# Altium PCB ECE453_Interface.PcbDoc
Units mil, origin at the board's own origin, x right, y up, seen from the top; angles counter-clockwise.
Board outline 3947.04 x 4820.02 mil, 2 copper layers (Top Layer, Bottom Layer); 72 components, 65 nets, 282 pads, 0 vias.
Unrouted connection lines stored in the file: 205.
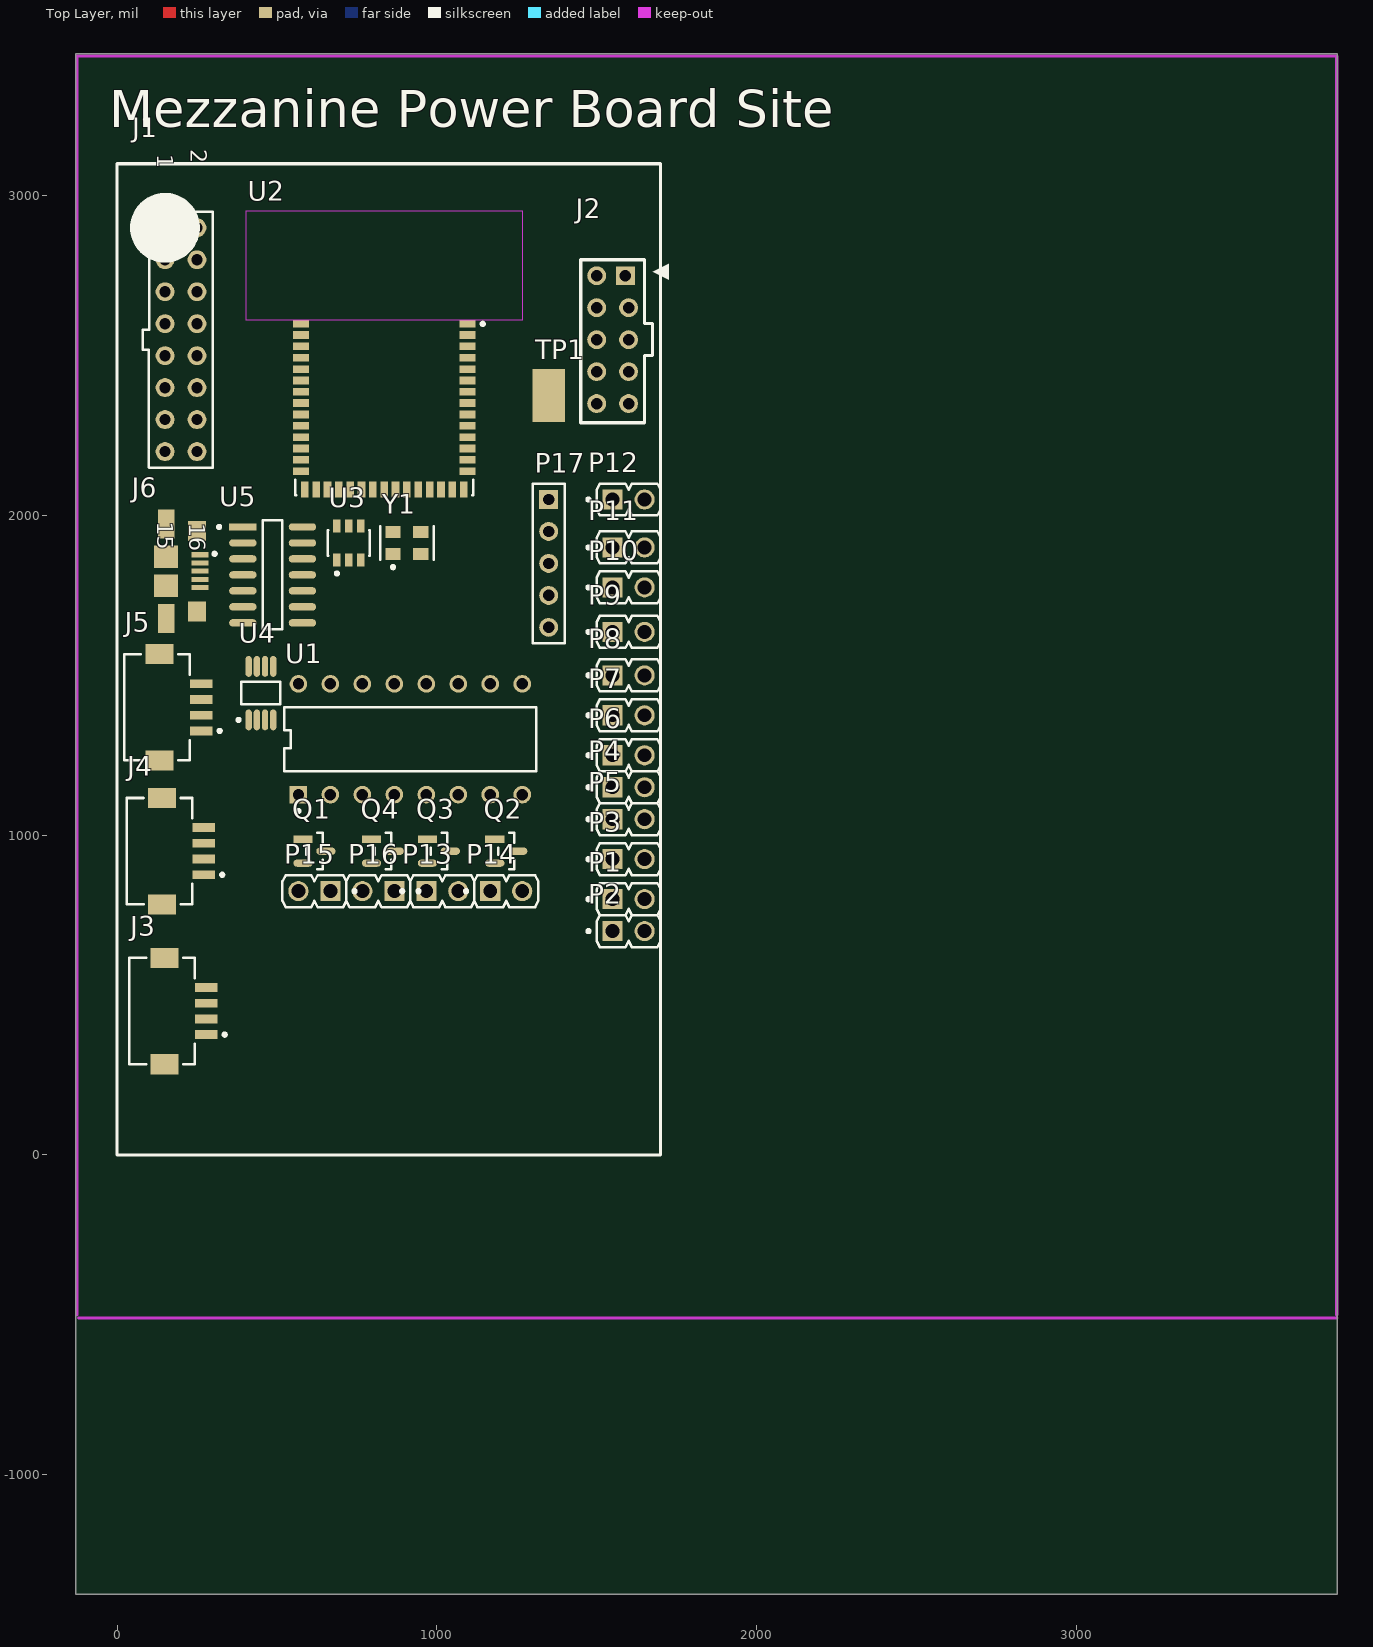
[diagram p0: Top Layer view]
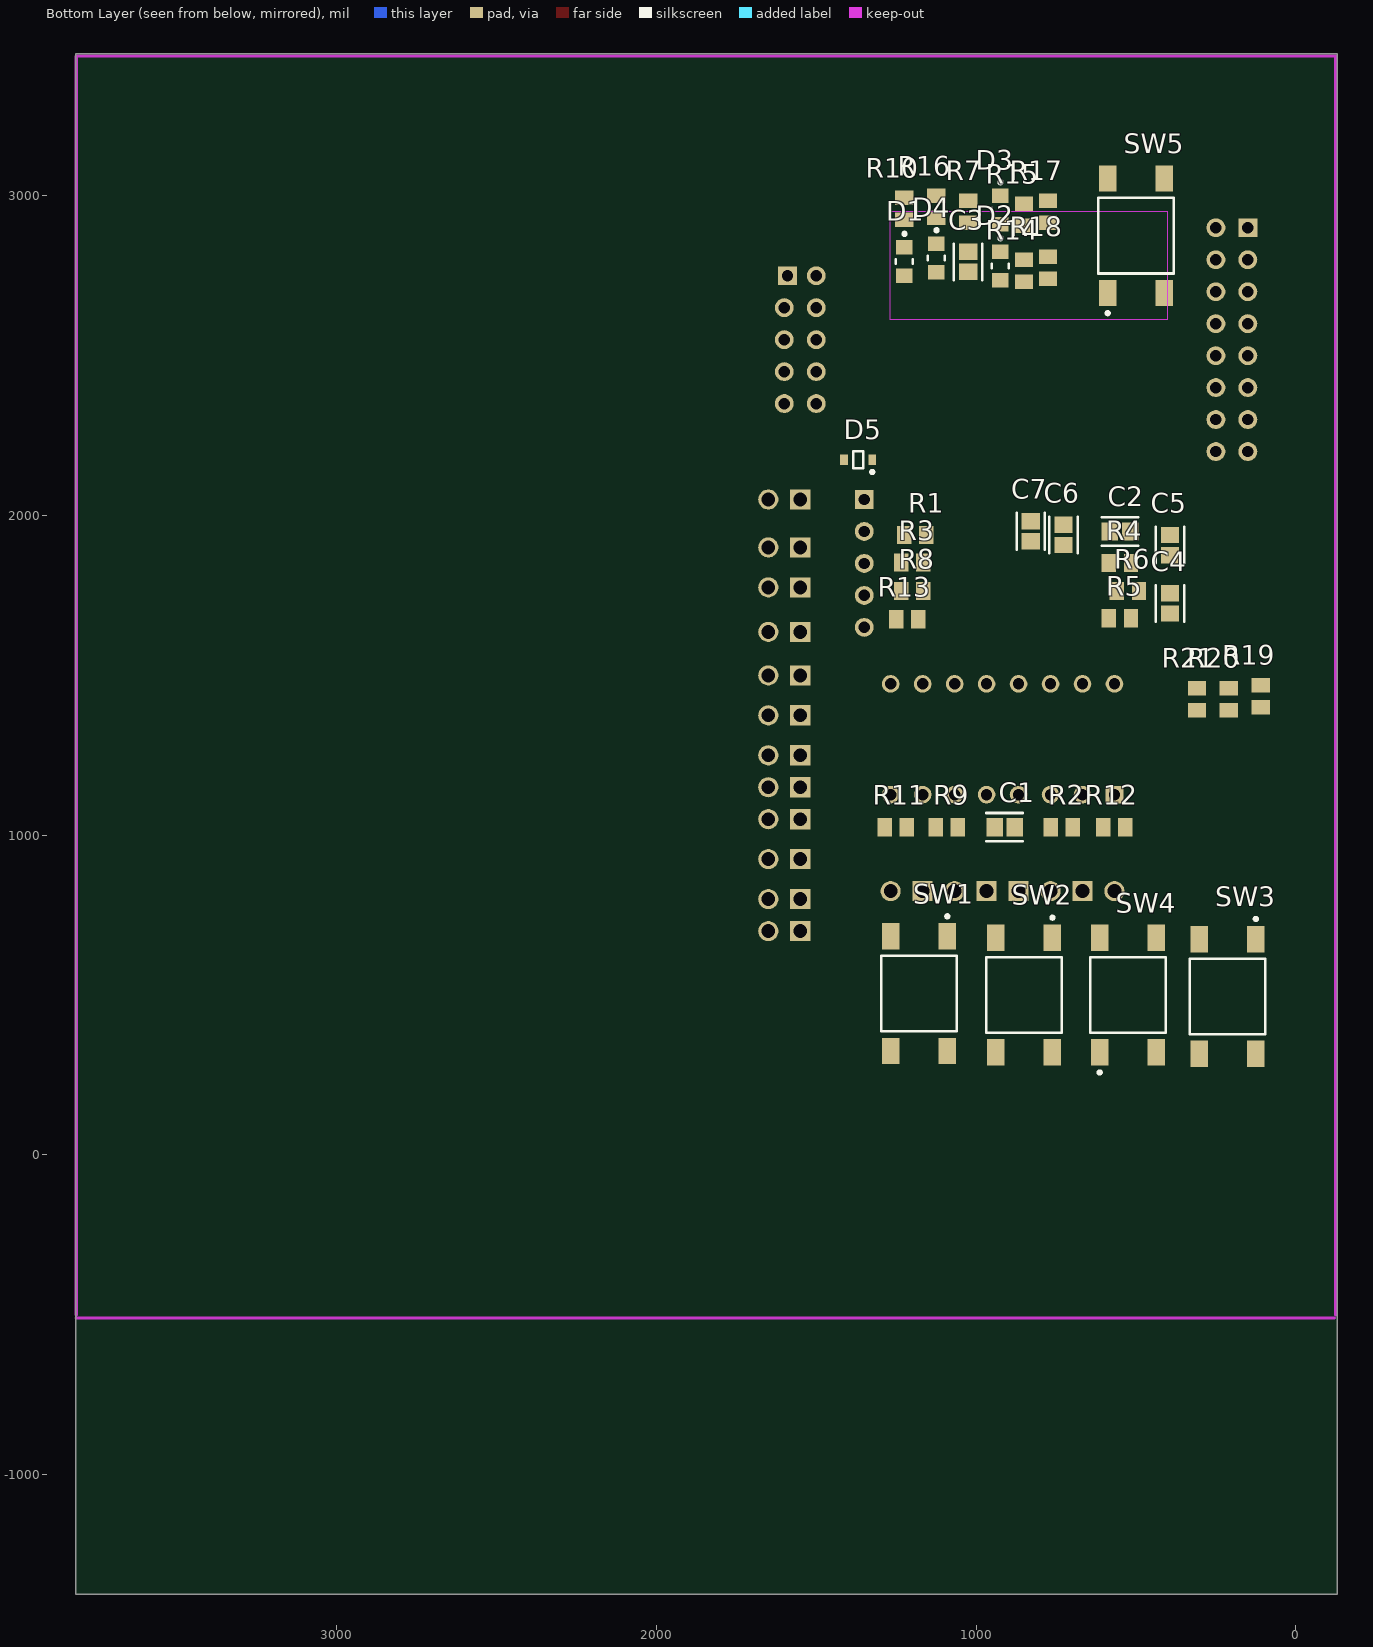
[diagram p1: Bottom Layer view, seen from below]

## Layer stack, top to bottom
Top Solder: solder mask 0.4, Solder Resist, Dk 3.5
Top Layer: signal copper 1.4
Dielectric1: dielectric 12.6, FR-4, Dk 4.8
Bottom Layer: signal copper 1.4
Bottom Solder: solder mask 0.4, Solder Resist, Dk 3.5

## Board outline
-130.02,-1375 3817.02,-1375 3817.02,3437.01 ccw(c3812.06,3437.02) 3816.79,3438.5 ccw(c3812.05,3439.99) 3817.02,3440 ccw(c3812.01,3440) 3812.01,3445.02 -125,3445.02 ccw(c-125,3440) -130.02,3440

## Design rules (kind name [scope] priority, off if disabled: settings)
Clearance Polygon_Clearance [All vs InPolygon] p1: gap=12 ignorepadtopadclearanceinfootprint=FALSE except(0: Arc-Hole Track-Hole SMDPad-Hole THPad-Hole Via-Hole Fill-Hole Poly-Hole Region-Hole Text-Hole)
Clearance [All] p2: gap=7.87 ignorepadtopadclearanceinfootprint=TRUE except(0: Arc-Hole Track-Hole SMDPad-Hole THPad-Hole Via-Hole Fill-Hole Poly-Hole Region-Hole Text-Hole)
ComponentClearance [InComponent('U3')] p1: gap=0 collisioncheckmode=3 verticalgap=10 showdistances=FALSE
Height [All] p1: minheight=0 maxheight=866.14 prefheight=500
HoleSize [All] p1: absolutevalues=TRUE maxlimit=250 minlimit=1.18 maxpercent=80.000 minpercent=20.000
MinimumSolderMaskSliver [All] p1: minsoldermaskwidth=7
NetAntennae NetAntennae_5.0V [InNet('5.0V')] p1: netantennaetolerance=0
NetAntennae NetAntennae_3.3V [InNet('3.3V')] p2: netantennaetolerance=0
PolygonConnect [IsNamedPolygon('5.0V_L01_P019') or IsNamedPolygon('3.3V_L01_P020') vs IsVia] p1: connectstyle=Relief reliefconductorwidth=10 reliefentries=4 polygonreliefangle="90 Angle" airgapwidth=10
PolygonConnect PolygonConnect_2 [All vs IsVia] p2: connectstyle=Relief reliefconductorwidth=15 reliefentries=4 polygonreliefangle="90 Angle" airgapwidth=10
PolygonConnect PolygonConnect_1 [All] p3: connectstyle=Relief reliefconductorwidth=10 reliefentries=4 polygonreliefangle="90 Angle" airgapwidth=10
RoutingVias [All] p1: holewidth=28 width=50 viastyle="Through Hole" minholewidth=15 minwidth=25 maxholewidth=28 maxwidth=50
SolderMaskExpansion [All] p1: expansion=4 istentingtop=FALSE
Width [All] p1: maxlimit=472.44 minlimit=3.94 preferedwidth=10 minimp=50.000000 maximp=50.000000 favimp=50.000000
25 further rules are at their usual default settings.

## Components (designator, comment, footprint, x,y, rotation, side; value= is the part's Value field where it differs from the comment)
C1 "Cap" Yageo_CC0805-0.85_IPC_B 910.76,1025 r180 bottom value=10nF
C2 "Cap" Yageo_CC0805-0.85_IPC_B 550,1950 r180 bottom value=10nF
C3 "Cap" Yageo_CC0805-0.85_IPC_B 1025,2793.47 r90 bottom value=10uF
C4 "Cap" Yageo_CC0805-0.85_IPC_B 393.38,1725 r90 bottom value=10uF
C5 "Cap" Yageo_CC0805-0.85_IPC_B 393.38,1907.45 r90 bottom value=10uF
C6 "Cap" Yageo_CC0805-0.85_IPC_B 726.57,1939.17 r90 bottom value=12pF
C7 "Cap" Yageo_CC0805-0.85_IPC_B 829.14,1950.71 r90 bottom value=12pF
D1 "LED1" Dialight_598_0 1225,2794.29 r270 bottom
D2 "LED1" Dialight_598_0 925,2780.71 r270 bottom
D3 "LED1" Dialight_598_0 925,2955.71 r270 bottom
D4 "LED1" Dialight_598_0 1125,2805.71 r270 bottom
D5 "" On_Semiconductor_BAT54HT1G_0 1368.9,2174.02 r0 bottom
J1 "SFH11-PBPC-D08-ST-BK" SFH11-PBPC-D08-ST-BK 200,2550 r270 top
J2 "SFH11-PBPC-D05-ST-BK" SFH11-PBPC-D05-ST-BK 1500,2550 r270 top
J3 "DF13A-4P-1_25H_51" Hirose_0_MFG 140.75,450 r90 top
J4 "DF13A-4P-1_25H_51" Hirose_0_MFG 132.87,950 r90 top
J5 "DF13A-4P-1_25H_51" Hirose_0_MFG 125,1400 r90 top
J6 "Conn_TE_CONNECTIVITY_-_AMP_CONNECTORS_1981584-1_eec" TE_CONNECTIVITY_-_AMP_CONNECTORS_1981584-1_0 153.54,1825.98 r270 top
P1 "613 002 111 21" WE-61300211121_V 1600,800 r0 top
P2 "613 002 111 21" WE-61300211121_V 1600,700 r0 top
P3 "613 002 111 21" WE-61300211121_V 1600,925 r0 top
P4 "613 002 111 21" WE-61300211121_V 1600,1150 r0 top
P5 "613 002 111 21" WE-61300211121_V 1600,1050 r0 top
P6 "613 002 111 21" WE-61300211121_V 1600,1250 r0 top
P7 "613 002 111 21" WE-61300211121_V 1600,1375 r0 top
P8 "613 002 111 21" WE-61300211121_V 1600,1500 r0 top
P9 "613 002 111 21" WE-61300211121_V 1600,1635.83 r0 top
P10 "613 002 111 21" WE-61300211121_V 1600,1775 r0 top
P11 "613 002 111 21" WE-61300211121_V 1600,1900 r0 top
P12 "613 002 111 21" WE-61300211121_V 1600,2050 r0 top
P13 "613 002 111 21" WE-61300211121_V 1017.28,825 r0 top
P14 "613 002 111 21" WE-61300211121_V 1217.28,825 r0 top
P15 "613 002 111 21" WE-61300211121_V 617.28,825 r180 top
P16 "613 002 111 21" WE-61300211121_V 817.28,825 r180 top
P17 "Header 5" HDR1X5 1350,2050 r270 top
Q1 "MOSFET-N" On_Semiconductor_318-08_IPC_B 617.28,950 r0 top
Q2 "MOSFET-N" On_Semiconductor_318-08_IPC_B 1217.28,950 r0 top
Q3 "MOSFET-N" On_Semiconductor_318-08_IPC_B 1006.45,950 r0 top
Q4 "MOSFET-N" On_Semiconductor_318-08_IPC_B 831.45,950 r0 top
R1 "Res1" RESC2013X70X40NL20T20 1190.55,1939.17 r0 bottom value=10K
R2 "Res1" RESC2013X70X40NL20T20 732.83,1025 r0 bottom value=10K
R3 "Res1" RESC2013X70X40NL20T20 1200,1852.76 r0 bottom value=10K
R4 "Res1" RESC2013X70X40NL20T20 550,1851.57 r180 bottom value=10K
R5 "Res1" RESC2013X70X40NL20T20 550,1678.35 r180 bottom value=10K
R6 "Res1" RESC2013X70X40NL20T20 525,1764.17 r180 bottom value=10K
R7 "0" RESC2013X70X40NL20T20 1025,2950 r90 bottom
R8 "Res1" RESC2013X70X40NL20T20 1200,1764.17 r0 bottom value=10K
R9 "Res1" RESC2013X70X40NL20T20 1092.28,1025 r180 bottom value=10K
R10 "Res1" RESC2013X70X40NL20T20 1225,2959.45 r90 bottom value=400
R11 "Res1" RESC2013X70X40NL20T20 1251.73,1025 r180 bottom value=10K
R12 "Res1" RESC2013X70X40NL20T20 567.28,1025 r180 bottom value=10K
R13 "Res1" RESC2013X70X40NL20T20 1215.55,1675.59 r0 bottom value=10K
R14 "Res1" RESC2013X70X40NL20T20 850,2765.55 r270 bottom value=400
R15 "Res1" RESC2013X70X40NL20T20 850,2940.55 r90 bottom value=400
R16 "Res1" RESC2013X70X40NL20T20 1125,2965.55 r90 bottom value=400
R17 "Res1" RESC2013X70X40NL20T20 775,2950 r90 bottom value=1.5K
R18 "Res1" RESC2013X70X40NL20T20 775,2775 r90 bottom value=1.5K
R19 "Res1" RESC2013X70X40NL20T20 109.45,1434.84 r90 bottom value=10K
R20 "Res1" RESC2013X70X40NL20T20 209.45,1425.39 r90 bottom value=10K
R21 "Res1" RESC2013X70X40NL20T20 309.45,1425.39 r90 bottom value=10K
SW1 "Switch_TE_FSM2JSMAATR_eec" TE_FSM2JSMAATR_0 1178.7,504.13 r270 bottom
SW2 "Switch_TE_FSM2JSMAATR_eec" TE_FSM2JSMAATR_0 850,500 r270 bottom
SW3 "Switch_TE_FSM2JSMAATR_eec" TE_FSM2JSMAATR_0 213.58,495.87 r270 bottom
SW4 "Switch_TE_FSM2JSMAATR_eec" TE_FSM2JSMAATR_0 525,500 r90 bottom
SW5 "Switch_TE_FSM2JSMAATR_eec" TE_FSM2JSMAATR_0 500,2875 r90 bottom
TP1 "TP_1206" TP-SMC-1206 1350,2375 r90 top
U1 "IC_STMicroelectronics_L293D_eec" STMicroelectronics_L293D_0 917.28,1300 r90 top
U2 "CYBLE-416045-02" Cypress_Semiconductor_0_MFG 835.59,2429.92 r0 top
U3 "SN74LVC1G11DBVR" Texas_Instruments_DBV0006A_0 725,1914.17 r0 top
U4 "PCT2075DP,118" NXP-SOT505-1_N 450,1444.29 r90 top
U5 "MCP2221A-I-SL" "Microchip_C04-065-SL_IPC_B - duplicate" 486.54,1814.17 r0 top
Y1 "ECS-327ATQMV-AS-TR" ECS_327ATQMV_MFG 906.46,1914.17 r0 top

## Footprints (in the part's own frame and the unit in brackets; to place one, negate y for a bottom-side part, rotate by r counter-clockwise, add the part's x,y. Pads: shape width x height; smd on the part's side, far side on the other; paste and mask are expansions set on the pad)
Cypress_Semiconductor_0_MFG [mm] "cypress"
  rect 1.27x0.61 smd paste+0 mask+0: 1(6.619,4.32) 2(6.619,3.42) 3(6.619,2.52) 4(6.619,1.62) 5(6.619,0.71) 6(6.619,-0.19) 7(6.619,-1.09) 8(6.619,-1.99) 9(6.619,-2.89) 10(6.619,-3.79) 11(6.619,-4.7) 12(6.619,-5.6) 13(6.619,-6.5) 14(6.619,-7.4) 30(-6.619,-7.4) 31(-6.619,-6.5) 32(-6.619,-5.6) 33(-6.619,-4.7) 34(-6.619,-3.79) 35(-6.619,-2.89) 36(-6.619,-1.99) 37(-6.619,-1.09) 38(-6.619,-0.19) 39(-6.619,0.71) 40(-6.619,1.62) 41(-6.619,2.52) 42(-6.619,3.42) 43(-6.619,4.32)
  rect 0.61x1.27 smd paste+0 mask+0: 15(6.31,-8.869) 16(5.41,-8.869) 17(4.51,-8.869) 18(3.61,-8.869) 19(2.71,-8.869) 20(1.8,-8.869) 21(0.9,-8.869) 22(0,-8.869) 23(-0.9,-8.869) 24(-1.8,-8.869) 25(-2.7,-8.869) 26(-3.61,-8.869) 27(-4.51,-8.869) 28(-5.41,-8.869) 29(-6.31,-8.869)
  Keep-Out Layer region: -11,4.63 11,4.63 11,13.25 -11,13.25
  Keep-Out Layer region: -11,4.63 11,4.63 11,13.25 -11,13.25
  silkscreen extent -7.07,-9.33 7.95,4.43, body extent -11,-9.6 11,13.25, height 0.25
Dialight_598_0 [mm] "led"
  rect 1.15x1.3 smd paste+0 mask+0: 1(-1.125,0) 2(1.125,0)
  silkscreen extent -2.32,-0.67 0.18,0.67, body extent -1.02,-0.63 0.99,0.62, height 0.7
ECS_327ATQMV_MFG [mm] "crystal"
  rect 1.2x0.95 smd paste+0 mask+0: 1(-1.1,-0.875) 2(1.1,-0.875) 3(1.1,0.875) 4(-1.1,0.875)
  silkscreen extent -2.1,-2.05 2.12,1.33, body extent -1.8,-1.45 1.8,1.45, height 0.25
HDR1X5 [mm] "Connector; Header; 5 Position"
  rect 1.5x1.5 hole 0.9: 1(0,0)
  round 1.5 hole 0.9: 2(2.54,0) 3(5.08,0) 4(7.62,0) 5(10.16,0)
  silkscreen extent -1.27,-1.27 11.43,1.27
Hirose_0_MFG [mm] "4 pin df13"
  rect 0.7x1.8 smd paste+0 mask+0: 1(-1.875,-3.5) 2(-0.625,-3.5) 3(0.625,-3.5) 4(1.875,-3.5)
  rect 1.6x2.2 smd paste+0 mask+0: 5(-4.225,-0.2) 6(4.225,-0.2)
  silkscreen extent -4.23,-5.1 4.23,2.6, body extent -5.13,-4.5 5.13,2.7, height 0.25
"Microchip_C04-065-SL_IPC_B - duplicate" [mil] "USB to UART"
  rect 85.59x22.92 smd paste+0 mask+0: 1(-93.15,150)
  rrect100% 85.59x22.92 smd paste+0 mask+0: 2(-93.15,100) 3(-93.15,50) 4(-93.15,0) 5(-93.15,-50) 6(-93.15,-100) 7(-93.15,-150) 8(93.15,-150) 9(93.15,-100) 10(93.15,-50) 11(93.15,0) 12(93.15,50) 13(93.15,100) 14(93.15,150)
  silkscreen extent -172,-170 31,170, body extent -146,-180 146,180, height 10
NXP-SOT505-1_N [mm] "TSOP, 8-Leads, Body 3.1x3.1mm, Pitch 0.65mm, IPC Medium Density"
  oval 1.65x0.5 smd: 1(-2.125,0.975) 2(-2.125,0.325) 3(-2.125,-0.325) 4(-2.125,-0.975) 5(2.125,-0.975) 6(2.125,-0.325) 7(2.125,0.325) 8(2.125,0.975)
  silkscreen extent -2.25,-1.55 0.9,1.9, body extent -1.55,-1.55 1.55,1.55, height 1.1
On_Semiconductor_318-08_IPC_B [mm] "n=fet"
  rect 1.524x0.578 smd paste+0 mask+0: 1(-0.91,0.95)
  rrect100% 1.524x0.578 smd paste+0 mask+0: 2(-0.91,-0.95) 3(0.91,0)
  silkscreen extent -0.65,-1.45 0.65,1.45, body extent -1.92,-1.7 1.92,1.7, height 0.25
On_Semiconductor_BAT54HT1G_0 [mm] "schotky"
  rect 0.63x0.83 smd paste+0 mask+0: 1(-1.115,0) 2(1.115,0)
  silkscreen extent -1.24,-0.67 0.4,1.09, body extent -1.25,-0.63 1.25,0.63, height 1.1
RESC2013X70X40NL20T20 [mm] "Chip Resistor, 2-Leads, Body 2.2x1.35mm, IPC Medium Density"
  rect 1.15x1.45 smd: 1(-0.875,0) 2(0.875,0)
  body extent -1.1,-0.72 1.1,0.72, height 0.7
SFH11-PBPC-D05-ST-BK [mm] "CONN HEADR FMALE 10POS .1\" DL AU"
  rect 1.5x1.5 hole 0.9: 1(-5.08,2.286)
  round 1.5 hole 0.9: 2(-5.08,0) 3(-2.54,2.54) 4(-2.54,0) 5(0,2.54) 6(0,0) 7(2.54,2.54) 8(2.54,0) 9(5.08,2.54) 10(5.08,0)
  silkscreen extent -6.35,-1.27 6.6,5.71, body extent -8.89,-1.92 8.89,5.08, height 8.39
SFH11-PBPC-D08-ST-BK [mm] "CONN HEADR FMALE 16POS .1\" DL AU"
  rect 1.5x1.5 hole 0.9: 1(-8.89,-1.27)
  round 1.5 hole 0.9: 2(-8.89,1.27) 3(-6.35,-1.27) 4(-6.35,1.27) 5(-3.81,-1.27) 6(-3.81,1.27) 7(-1.27,-1.27) 8(-1.27,1.27) 9(1.27,-1.27) 10(1.27,1.27) 11(3.81,-1.27) 12(3.81,1.27) 13(6.35,-1.27) 14(6.35,1.27) 15(8.89,-1.27) 16(8.89,1.27)
  silkscreen extent -10.16,-3.03 10.17,2.54, body extent -12.57,-4.13 12.83,2.87, height 8.85
STMicroelectronics_L293D_0 [mm]
  rect 1.4x1.4 hole 0.9 paste-1000 mask+0: 1(-4.4,8.89)
  round 1.4 hole 0.9 paste-1000 mask+0: 2(-4.4,6.35) 3(-4.4,3.81) 4(-4.4,1.27) 5(-4.4,-1.27) 6(-4.4,-3.81) 7(-4.4,-6.35) 8(-4.4,-8.89) 9(4.4,-8.89) 10(4.4,-6.35) 11(4.4,-3.81) 12(4.4,-1.27) 13(4.4,1.27) 14(4.4,3.81) 15(4.4,6.35) 16(4.4,8.89)
  silkscreen extent -5.82,-10 2.55,10, body extent -5.2,-10.1 5.2,10.1, height 0.25
TE_CONNECTIVITY_-_AMP_CONNECTORS_1981584-1_0 [mm]
  rect 0.4x1.35 smd paste+0 mask+0: 1(-1.3,2.675) 2(-0.65,2.675) 3(0,2.675) 4(0.65,2.675) 5(1.3,2.675)
  rect 1.6x1.4 smd paste+0 mask+0: 6(-3.2,2.45) 11(3.2,2.45)
  rect 2.3x1.3 smd paste+0 mask+0: 7(-3.75,0) 10(3.75,0)
  rect 1.8x1.9 smd paste+0 mask+0: 8(-1.15,0) 9(1.15,0)
  silkscreen extent -1.5,3.73 -1.25,3.98, body extent -5,-2.9 5,3.45, height 0.25
TE_FSM2JSMAATR_0 [mm]
  rect 2.1x1.4 smd paste+0 mask+0: 1(-4.55,2.25) 2(4.55,2.25) 3(-4.55,-2.25) 4(4.55,-2.25)
  silkscreen extent -6.27,-3 3,3, body extent -5,-3.02 5,2.98, height 4.37
Texas_Instruments_DBV0006A_0 [mm]
  rect 0.6x1.05 smd paste-1000 mask+0: 1(-0.95,-1.35) 2(0,-1.35) 3(0.95,-1.35) 4(0.95,1.35) 5(0,1.35) 6(-0.95,1.35)
  silkscreen extent -1.67,-2.55 1.68,1.02, body extent -1.78,-1.97 1.78,1.97, height 0.25
TP-SMC-1206 [mm] "Surface mount test point 1206"
  rect 4.2x2.6 smd mask+0: 1(0,0)
  body extent -1.57,-0.79 1.63,0.81, height 1.22
WE-61300211121_V [mm] "Header, 2-Leads, Body 5.08x2.54mm, Pitch 2.54mm"
  rect 1.6x1.6 hole 1.1: 1(-1.27,0)
  round 1.6 hole 1.1: 2(1.27,0)
  silkscreen extent -3.31,-1.27 2.54,1.27, body extent -2.54,-1.27 2.54,1.27, height 8.54
Yageo_CC0805-0.85_IPC_B [mil] "0805 cap"
  rect 51.36x57.33 smd paste+0 mask+0: 1(-31.53,0) 2(31.53,0)
  silkscreen extent -57,-44 57,44, body extent -39,-25 39,25, height 37

## Part data
C1 C2: "Capacitor", Supplier Part Number 1=311-1136-1-ND, LatestRevisionDate=17-Jul-2002, LatestRevisionNote="Re-released for DXP Platform.", PackageDescription="Radial Cap, Thru-Hole; 2 Leads; 0.3 in Pin Spacing", PackageReference=RAD-0.3, Published=8-Jun-2000, Publisher="Altium Limited", Supplier 1=Digi-Key
C3 C4 C5: "Capacitor", Supplier Part Number 1=311-1355-1-ND, LatestRevisionDate=17-Jul-2002, LatestRevisionNote="Re-released for DXP Platform.", PackageDescription="Radial Cap, Thru-Hole; 2 Leads; 0.3 in Pin Spacing", PackageReference=RAD-0.3, Published=8-Jun-2000, Publisher="Altium Limited", Supplier 1=Digi-Key
C6 C7: "Capacitor", Supplier Part Number 1=311-1100-1-ND, LatestRevisionDate=17-Jul-2002, LatestRevisionNote="Re-released for DXP Platform.", PackageDescription="Radial Cap, Thru-Hole; 2 Leads; 0.3 in Pin Spacing", PackageReference=RAD-0.3, Published=8-Jun-2000, Publisher="Altium Limited", Supplier 1=Digi-Key
D1 D2 D3 D4: "Typical RED GaAs LED", Supplier Part Number 1=350-2038-1-ND, LatestRevisionDate=08-Jul-2005, LatestRevisionNote="Mech Layer 1 removed.", PackageDescription="LED; 2 Leads", PackageReference=LED-1, Published=8-Jun-2000, Publisher="Altium Limited", Supplier 1=Digi-Key
D5: library part "D Schottky", "Schottky Diode", Supplier Part Number 1=BAT54HT1GOSCT-ND, Code_JEDEC=DO-214-AA, LatestRevisionDate=17-Jul-2002, LatestRevisionNote="Re-released for DXP Platform.", PackageDescription="DO-214-AA/SMB; 2 C-Bend Leads; Body 5.3 x 3.6 mm, inc. leads (LxW)", PackageReference=SMB, Published=8-Jun-2000, Publisher="Altium Limited", Supplier 1=Digi-Key
J1: "CONN HDR 10POS 0.1 GOLD PCB", Color=Black, Manufacturer 1=Sullins, Package Quantity=1, Supplier Part Number 1=S9196-ND, ComponentLink1Description=https://datasheet.ciiva.com/754/sfh11-pxxc-dxx-st-xx11160-c-754555.pdf?src-supplier=Digi-Key, ComponentLink1URL=https://datasheet.ciiva.com/754/sfh11-pxxc-dxx-st-xx11160-c-754555.pdf?src-supplier=Digi-Key, ComponentLink2Description=https://datasheet.ciiva.com/754/sfh11-pxxc-dxx-st-xx11160-c-754557.pdf?src-supplier=Digi-Key, ComponentLink2URL=https://datasheet.ciiva.com/754/sfh11-pxxc-dxx-st-xx11160-c-754557.pdf?src-supplier=Digi-Key, Connector Type=Header,Socket, Contact Plating=Gold, Lead Free="Lead Free", Manufacturer Part Number 1=SFH11-PBPC-D08-ST-BK, Mount="Through Hole", Number of Positions=16, Number of Rows=2, Packaging=Tray, Pitch=0.1inch, Pricing 1="1=1.04000, 10=0.91600, 100=0.79000, 500=0.64638, 1000=0.57456, 5000=0.51870 (USD)", RoHS=Yes, Row Spacing=0.1inch, Stock 1=0, Supplier 1=Digi-Key, Termination=Solder
J2: "CONN HDR 10POS 0.1 GOLD PCB", Color=Black, Manufacturer 1=Sullins, Package Quantity=1, Supplier Part Number 1=S9194-ND, ComponentLink1Description=https://datasheet.ciiva.com/754/sfh11-pxxc-dxx-st-xx11160-c-754555.pdf?src-supplier=Digi-Key, ComponentLink1URL=https://datasheet.ciiva.com/754/sfh11-pxxc-dxx-st-xx11160-c-754555.pdf?src-supplier=Digi-Key, Connector Type=Header, Contact Plating=Gold, Lead Free="Lead Free", Manufacturer Part Number 1=SFH11-PBPC-D05-ST-BK, Mount="Through Hole", Number of Positions=10, Number of Rows=2, Packaging=Tray, Pitch=0.1inch, Pricing 1="1=0.66000, 10=0.57600, 100=0.49700, 500=0.40662, 1000=0.36144, 5000=0.32630 (USD)", RoHS=Yes, Row Spacing=0.1inch, Stock 1=26289, Supplier 1=Digi-Key, Termination=Solder
J3 J4 J5: "4 pin df13", Supplier Part Number 1=H125779CT-ND, Supplier 1=Digi-Key
J6: "Micro USB2.0", Digikey Part Number=A97799CT-ND, Manufacturer="TE CONNECTIVITY - AMP CONNECTORS", Mouser Part Number=571-1981584-1, Operating Temperature High=85°C, Operating Temperature Low=-30°C, Package=CONN_USB_SMT, Part Number=1981584-1, Temperature=to, Voltage=30V, ComponentLink1Description=Upverter, ComponentLink1URL=https://upverter.com/upn/revision/dedb0eacb1b6d15a/, ComponentLink2Description=Datasheet, ComponentLink2URL=http://www.te.com/commerce/DocumentDelivery/DDEController?Action=srchrtrv&DocNm=1981584&DocType=Customer+Drawing&DocLang=English, helpURL=https://upverter.com/upn/revision/dedb0eacb1b6d15a/, Is Female=yes, Price=1.40015774577, RoHS=UNKNOWN, Supplier 1=Digi-Key, Supplier 2=Mouser, Supplier Part Number 1=A97799CT-ND
P1 P2 P3 P4 P5 P6 P7 P8 P9 P10 P11 P12 P13 P14 P15 P16: library part 61300211121, "Male Header, Pitch 2.54 mm, 1 x 2 Position, Height 8.54 mm, Tail Length 3 mm, -40 to 105 degC, RoHS, Bulk", Supplier Part Number 1=732-5315-ND, ComponentLink1Description="Manufacturer URL", ComponentLink1URL=https://www.we-online.com/, ComponentLink2Description=Datasheet, ComponentLink2URL=http://katalog.we-online.de/em/datasheet/6130xx11121.pdf, DatasheetVersion="Rev. J", Mounting Technology="Through Hole", PackageDescription="Male Header, Pitch 2.54 mm, 1 x 2 Position, Height 8.54 mm, Tail Length 3 mm", PartNumber="613 002 111 21", Supplier 1=Digi-Key
P17: "CONN HDR 5POS 0.1 GOLD PCB", Color=Black, Manufacturer=Sullins, Manufacturer Part Number=PPPC051LFBN-RC, Package Quantity=1000, Supplier Part Number 1=S7038-ND, Category=Connectors, ComponentLink1Description=https://media.digikey.com/pdf/Data%20Sheets/Sullins%20PDFs/Female_Headers.100_DS.pdf?src-supplier=Digi-Key, ComponentLink1URL=https://media.digikey.com/pdf/Data%20Sheets/Sullins%20PDFs/Female_Headers.100_DS.pdf?src-supplier=Digi-Key, ComponentLink2Description=http://www.sullinscorp.com/catalogs/78_Page80-81_HEADER_.100_2.54mm_FEMALE.pdf?src-supplier=Future+Electronics, ComponentLink2URL=http://www.sullinscorp.com/catalogs/78_Page80-81_HEADER_.100_2.54mm_FEMALE.pdf?src-supplier=Future+Electronics, Connector Type=Header, Contact Material=Bronze, Contact Plating=Gold, Contact Type="Female Socket", Height=8.5mm, Housing Material=Plastic, LatestRevisionDate=17-Jul-2002, LatestRevisionNote="Re-released for DXP Platform.", Lead Free="Lead Free", Length=13.2mm, Mount="Through Hole", Number of Positions=5, Number of Rows=1, Packaging=Bulk, Pitch=0.1inch, Pricing 1="1=0.49000, 10=0.45900, 100=0.35190, 500=0.30600, 1000=0.25245, 5000=0.22185, 10000=0.22100 (USD)", Publisher="Altium Limited", RoHS=Yes, RoHS Compliant=Yes, Stock 1=10661, Supplier 1=Digi-Key, Termination=Solder, Width=2.5mm
Q1 Q2 Q3 Q4: "N-Channel MOSFET", Supplier Part Number 1=BSS138LT3GOSCT-ND, LatestRevisionDate=17-Jul-2002, LatestRevisionNote="Re-released for DXP Platform.", PackageDescription="TO, Flat Index; 3 In-Line, Axial Leads; Body Dia. 4.6mm; Lead Dia. 0.5 mm (max)", PackageReference=E3, PackageVersion=1995/1996, Published=8-Jun-2000, Publisher="Altium Limited", Supplier 1=Digi-Key
R1 R2 R3 R4 R5 R6 R8 R9 R11 R12 R13 R19 R20 R21: "Resistor", Supplier Part Number 1=P10.0KCCT-ND, LatestRevisionDate=17-Jul-2002, LatestRevisionNote="Re-released for DXP Platform.", PackageDescription="Axial Device, Thru-Hole; 2 Leads; 0.3 in Pin Spacing", PackageReference=AXIAL-0.3, Published=8-Jun-2000, Publisher="Altium Limited", Supplier 1=Digi-Key
R7: library part Res1, "Resistor", Supplier Part Number 1=P0.0ACT-ND, LatestRevisionDate=17-Jul-2002, LatestRevisionNote="Re-released for DXP Platform.", PackageDescription="Axial Device, Thru-Hole; 2 Leads; 0.3 in Pin Spacing", PackageReference=AXIAL-0.3, Published=8-Jun-2000, Publisher="Altium Limited", Supplier 1=Digi-Key
R10 R14 R15 R16: "Resistor", Supplier Part Number 1=541-430CCT-ND, LatestRevisionDate=17-Jul-2002, LatestRevisionNote="Re-released for DXP Platform.", PackageDescription="Axial Device, Thru-Hole; 2 Leads; 0.3 in Pin Spacing", PackageReference=AXIAL-0.3, Published=8-Jun-2000, Publisher="Altium Limited", Supplier 1=Digi-Key
R17 R18: "Resistor", Supplier Part Number 1=2019-RK73B2ATTD152JCT-ND, LatestRevisionDate=17-Jul-2002, LatestRevisionNote="Re-released for DXP Platform.", PackageDescription="Axial Device, Thru-Hole; 2 Leads; 0.3 in Pin Spacing", PackageReference=AXIAL-0.3, Published=8-Jun-2000, Publisher="Altium Limited", Supplier 1=Digi-Key
SW1 SW2 SW3 SW4 SW5: "SWITCH TACTILE SPST-NO 0.05A 24V", Digikey Part Number=450-1792-1-ND, Manufacturer=TE, Mouser Part Number=506-FSM2JSMAATR, Package=SW_SMT_TACT, Part Number=FSM2JSMAATR, Temperature="-35°C to +85°C", Temperature Range High=+85°C, Temperature Range Low=-35°C, ComponentLink1Description=Upverter, ComponentLink1URL=https://upverter.com/upn/revision/e87fdb98fc0d886d/, ComponentLink2Description=Datasheet, ComponentLink2URL=http://www.te.com/commerce/DocumentDelivery/DDEController?Action=srchrtrv&DocNm=2-1437565-7&DocType=Customer+Drawing&DocLang=English, Digikey Description="SWITCH TACTILE SPST-NO 0.05A 24V", helpURL=https://upverter.com/upn/revision/e87fdb98fc0d886d/, Lead Free=yes, RoHS=TRUE, Supplier 1=Digi-Key, Supplier 2=Mouser, Supplier Part Number 1=450-1792-1-ND, Supplier Part Number 2=506-FSM2JSMAATR
TP1: "Test Point SMD 1206", Supplier Part Number 1=A106143CT-ND, Supplier 1=Digi-Key
U1: "4-Channel Motor Driver 24V 16-Pin Power DIP Tube", Case/Package=DIP, Collector Emitter Voltage (VCEO)=36V, Digikey Part Number=497-2936-5-ND, Manufacturer=STMicroelectronics, Manufacturer Part Number=L293D, Max Collector Current=600mA, Max Operating Temperature=150°C, Max Output Current=1.2A, Min Operating Temperature=-40°C, Min Supply Voltage=4.5V, Mouser Part Number=511-L293D, Octopart Part Number=81d548d881985e12, Operating Supply Current=2mA, Operating Supply Voltage=24V, Package="Powerdip (12+2+2)", Package Quantity=25, Power Dissipation=4W, Temperature="-40°C to +150°C", Temperature Range High=+150°C, Category="Motor Drivers", Category 2Fc5E2Cf1B85F402="Interface ICs", Category 9E07530Daf1645C0="Semiconductors and Actives", Category 20B3Edb914A9Fb74=Uncategorized, Category 45Fa88F0772B9E3D="Half Bridges", Category 84F649Fcb0Ed5F31=Uncategorized, Category 56439B4967F48D84="Power Management", Category D2Bc1Fb6E06F097B="Solid State Switches", ComponentLink1Description=Upverter, ComponentLink1URL=https://upverter.com/upn/revision/e6134e389598ca22/, ComponentLink2Description=Datasheet, ComponentLink2URL=https://upverter.com/datasheet/69b4bfb6eef435fc169310577e03cbf66990c4fa.pdf, ComponentLink3Description=https://datasheet.ciiva.com/15109/getdatasheetpartid-121660-15109379.pdf?src-supplier=Verical, ComponentLink3URL=https://datasheet.ciiva.com/15109/getdatasheetpartid-121660-15109379.pdf?src-supplier=Verical, ComponentLink4Description=https://datasheet.ciiva.com/14150/ocl293d-647107-dat-en-14150297.pdf?src-supplier=Distrelec, ComponentLink4URL=https://datasheet.ciiva.com/14150/ocl293d-647107-dat-en-14150297.pdf?src-supplier=Distrelec, ComponentLink5Description=https://datasheet.ciiva.com/26347/82-0192-26347871.pdf?src-supplier=Rapid+Electronics, ComponentLink5URL=https://datasheet.ciiva.com/26347/82-0192-26347871.pdf?src-supplier=Rapid+Electronics, ComponentLink6Description=https://datasheet.ciiva.com/29307/156134-da-01-en-4-kanal-treiber-ic-l293d-stm-29307000.pdf?src-supplier=Conrad, ComponentLink6URL=https://datasheet.ciiva.com/29307/156134-da-01-en-4-kanal-treiber-ic-l293d-stm-29307000.pdf?src-supplier=Conrad, ComponentLink7Description=https://datasheet.ciiva.com/1955/cd00000059-1955400.pdf?src-supplier=Digi-Key, ComponentLink7URL=https://datasheet.ciiva.com/1955/cd00000059-1955400.pdf?src-supplier=Digi-Key, ComponentLink8Description=https://datasheet.ciiva.com/4895/cd00000059-4895945.pdf?src-supplier=Mouser, ComponentLink8URL=https://datasheet.ciiva.com/4895/cd00000059-4895945.pdf?src-supplier=Mouser, ComponentLink9Description=https://datasheet.ciiva.com/16458/cd00000059-16458220.pdf?src-supplier=Future+Electronics, ComponentLink9URL=https://datasheet.ciiva.com/16458/cd00000059-16458220.pdf?src-supplier=Future+Electronics, Digikey Description="IC Bipolar Motor Driver Parallel 16-PowerDIP", Height=5.1mm, helpURL=https://upverter.com/upn/revision/e6134e389598ca22/, Ipc Land Pattern Name=DIP880W50P254L2000H510Q16, Lead Free=yes, Length=20mm, Max Supply Voltage=36V, Motor Type=Brushed, Mount="Through Hole", Mounting Type="Through Hole", Num Pins=16, Number of Channels=4, Number of Outputs=4, Number of Pins=16, Output Current=600mA, Output Current per Channel=600mA, Packaging=Rail/Tube, Part Number=L293D, Price=2.80087938713, Pricing 1="1=4.15000, 10=3.72300, 25=3.52000, 100=2.95180 (USD)", Radiation Hardening=No, RoHS=TRUE, RoHS Compliant=Yes, Series=-, Stock 1=710, Supplier 1=Digi-Key, Supplier 2=Mouser, Supplier Part Number 1=497-2936-5-ND, Supplier Part Number 2=511-L293D, Symbol 0 0=Standard, Temperature Range Low=-40°C, Type="integrated circuit", Width=7.1mm
U2: "CONN HDR 5POS 0.1 GOLD PCB", Color=Black, Manufacturer=Sullins, Manufacturer Part Number=PPPC051LFBN-RC, Package=None, Package Quantity=1000, Supplier Part Number 1=428-4622-1-ND, Availability=Unavailable, Category=Connectors, ComponentLink1Description=https://media.digikey.com/pdf/Data%20Sheets/Sullins%20PDFs/Female_Headers.100_DS.pdf?src-supplier=Digi-Key, ComponentLink1URL=https://media.digikey.com/pdf/Data%20Sheets/Sullins%20PDFs/Female_Headers.100_DS.pdf?src-supplier=Digi-Key, ComponentLink2Description=http://www.sullinscorp.com/catalogs/78_Page80-81_HEADER_.100_2.54mm_FEMALE.pdf?src-supplier=Future+Electronics, ComponentLink2URL=http://www.sullinscorp.com/catalogs/78_Page80-81_HEADER_.100_2.54mm_FEMALE.pdf?src-supplier=Future+Electronics, Connector Type=Header, Contact Material=Bronze, Contact Plating=Gold, Contact Type="Female Socket", Height=8.5mm, Housing Material=Plastic, Lead Free="Lead Free", Length=13.2mm, MF="{'manufacturer': u'Cypress Semiconductor'}", Mount="Through Hole", MP=CYBLE-416045-02, Number of Positions=5, Number of Rows=1, Packaging=Bulk, Pitch=0.1inch, Price=None, Pricing 1="1=0.49000, 10=0.45900, 100=0.35190, 500=0.30600, 1000=0.25245, 5000=0.22185, 10000=0.22100 (USD)", RoHS=Yes, RoHS Compliant=Yes, Stock 1=10661, Supplier 1=Digi-Key, Termination=Solder, Width=2.5mm
U3: "3 to 1 AND Gate", Supplier Part Number 1=296-16810-1-ND, Supplier 1=Digi-Key
U4: "I2C-Bus Fm+, 1 Degree C Accuracy, Digital Temperature Sensor and Thermal Watchdog, 2.7 to 5.5 V Supply, -55 to 125 degC, 8-Pin SOT505-1, RoHS, Reel", Manufacturer="NXP Semiconductors", Operating Voltage (VDC)="2.7 to 5.5", Supplier Part Number 1=568-10956-1-ND, Accuracy on-chip (degC)="1@-25 to 100 / 2@-55 to 125", Assignable addresses=27, ComponentLink1Description="Manufacturer URL", ComponentLink1URL=http://www.nxp.com/, ComponentLink2Description=Datasheet, ComponentLink2URL=http://www.nxp.com/documents/data_sheet/PCT2075.pdf, ComponentLink3Description="Package Specification", ComponentLink3URL=http://www.nxp.com/documents/outline_drawing/sot505-1_po.pdf, DatasheetVersion="Rev. 7", Mounting Technology="Surface Mount", PackageDescription="8-Pin Plastic Thin Shrink Small Outline Package, Body 3 x 3 mm, Pitch 0.65 mm", PackageReference=SOT505-1, PackageVersion="03-02-18, 02/2003", Packing=Reel, PartNumber=PCT2075DP,118, SMBus clock (kHz)=1000, Supplier 1=Digi-Key
U5: "USB to UART", Supplier Part Number 1=57AC2483, Supplier 1=Newark
Y1: "crystal oscillator", Supplier Part Number 1=XC2826CT-ND, Supplier 1=Digi-Key

## Nets (pads, with @x,y where several pads share a name; then routed paths per layer and width w, separated by ;. In a path a pad name is that pad's centre, name@x,y a point inside that pad or via, vN(x,y) a via of type N, cw(c..) or ccw(c..) an arc to the next point about the centre after c; other vN are vias at no path point)
3.3V: C2.2 C3.2 C4.1 C5.1 D5.2 J3.3 J4.3 P8.1 P8.2 R1.2 R2.2 R3.2 R4.2 R5.2 R6.2 R7.1 R8.2 R9.1 R11.1 R12.1 R13.2 R17.1 R18.1 U1.1 U1.9 U2.4 U3.5 U5.1 U5.4 U5.11 Y1.4
5.0V: J2.2 J2.4 J2.6 J2.8 J2.10 TP1.1
5V: C1.2 J6.1 P5.1 P5.2 U1.16
12V: J1.10 J1.12 J1.14 J1.16 J5.3 P2.1 P2.2 P6.1 P9.1 U1.8
A0: R19.1 U4.7
A1: R20.1 U4.6
A2: R21.1 U4.5
AND_RESULT: U2.42 U3.4
D+: J6.2 U5.12
D-: J6.3 U5.13
Driver_1: Q1.1 R2.1 U1.2
Driver_2: Q3.1 R9.2 U1.7
Driver_3: Q4.1 R11.2 U1.10
Driver_4: Q2.1 R12.2 U1.15
EXTRA_POWER_ON: J5.2 U2.30
FAN_O1: U2.41
FAN_O2: U2.2
GND: C1.1 C2.1 C3.1 C4.2 C5.2 C6.1 C7.1 D1.2 D2.2 D3.2 D4.2 J1.1 J1.3 J1.5 J1.7 J1.9 J1.11 J1.13 J2.1 J2.3 J2.5 J2.7 J2.9 J3.4 J3.5 J3.6 J4.4 J4.5 J4.6 J5.4 J5.5 J5.6 J6.5 J6.6 J6.7 J6.8 J6.9 J6.10 J6.11 P6.2 P9.2 P11.1 P11.2 P13.2 P14.2 P15.2 P16.2 P17.2 Q1.3 Q2.3 Q3.3 Q4.3 R19.2 R20.2 R21.2 SW1.3 SW1.4 SW2.3 SW2.4 SW3.3 SW3.4 SW4.3 SW4.4 SW5.1 SW5.2 U1.4 U1.5 U1.12 U1.13 U2.1 U2.15 U2.43 U3.2 U4.4 U5.14 Y1.2
LED1: R10.1 U2.20
LED2: R14.1 U2.19
LED2_2: D2.1 R14.2
LIGHTS_ON: J5.1 U2.28
MCU_RX: U2.17 U5.6
MCU_TX: U2.18 U5.5
NetD1_1: D1.1 R10.2
NetD3_1: D3.1 R15.2
NetD4_1: D4.1 R16.2
NetD5_1: D5.1 P17.1
NetP1_1: P1.1
NetP1_2: P1.2 U2.23
NetP3_1: P3.1
NetP3_2: P3.2 U2.22
NetP4_1: P4.1 U2.31
NetP4_2: P4.2 U2.14
NetP7_1: P7.1 U2.9
NetP7_2: P7.2 U2.21
NetP10_1: P10.1 U2.8
NetP10_2: P10.2 U2.7
NetP12_1: P12.1 U2.33
NetP12_2: P12.2 U2.34
NetP13_1: P13.1 U1.3
NetP14_1: P14.1 U1.6
NetP15_1: P15.1 U1.11
NetP16_1: P16.1 U1.14
NetR1_1: R1.1 SW1.1 SW1.2 U2.25
NetR3_1: R3.1 SW2.1 SW2.2 U2.36
NetR7_2: R7.2 U2.3
NetR8_1: R8.1 SW3.1 SW3.2 U2.32
NetR13_1: R13.1 SW4.1 SW4.2 U2.24
NetR15_1: R15.1 U2.10
NetR16_1: R16.1 U2.11
PB_RESET: R5.1 SW5.3 SW5.4 U3.3
PRG_RESET: P17.3 R6.1 U3.6
PWM1: Q1.2 U2.39
PWM2: Q3.2 U2.40
PWM3: Q4.2 U2.38
PWM4: Q2.2 U2.37
PWR_GOOD_3P3: J1.15 R4.1 U3.1
SCL: J3.1 J4.1 R18.2 U2.13 U4.2
SDA: J3.2 J4.2 R17.2 U2.12 U4.1
SWDCLK: P17.4 U2.26
SWDIO: P17.5 U2.27
V_3.3: J1.2 J1.4 J1.6 J1.8
WCO_IN: C7.2 U2.5 Y1.1
WCO_OUT: C6.2 U2.6 Y1.3
pads on no net: J6.4 U2.16 U2.29 U2.35 U4.3 U4.8 U5.2 U5.3 U5.7 U5.8 U5.9 U5.10

## Keep-outs
Keep-Out Layer:
  lines w10: -125,-500 -125,3437.01 1675,3437.01 3812.01,3437.01 ; -121.06,-510 3815,-510 ; 3815,-500 3815,3437.01

## Silkscreen, mask and mechanical layers (free items; w line width, h text height)
Top Overlay:
  circle w118.11: c150,2900 r50
  lines w10: 0,0 1700,0 1700,3000 1700,3100 1600,3100 1550,3100 0,3100 0,0
  text "Mezzanine Power Board Site" at -25,3175 h200
Mechanical 9:
  lines w10: 3812.01,3437.01 3812.01,-500 -125,-500 -125,3440 1308.94,3440 3812.01,3440

## Dimensions
-125,-500 to 3815,-500 on Mechanical 13

## Text inside footprints (layer, text, board x,y; h text height)
J1: Top Overlay "16" at 225,1975 h50 r270; Top Overlay "15" at 125,1980 h50 r270; Top Overlay "1" at 125,3130 h50 r270; Top Overlay "2" at 230,3145 h50 r270